# Altium PCB Copy of Platine_Spannungsmessung.PcbDoc
Units mm, origin at the board's own origin, x right, y up, seen from the top; angles counter-clockwise.
Board outline 188.5 x 153 mm, 2 copper layers (Top Layer, Bottom Layer), stack 1.27 mm thick; 74 components, 29 nets, 188 pads, 0 vias.
Unrouted connection lines stored in the file: 24.
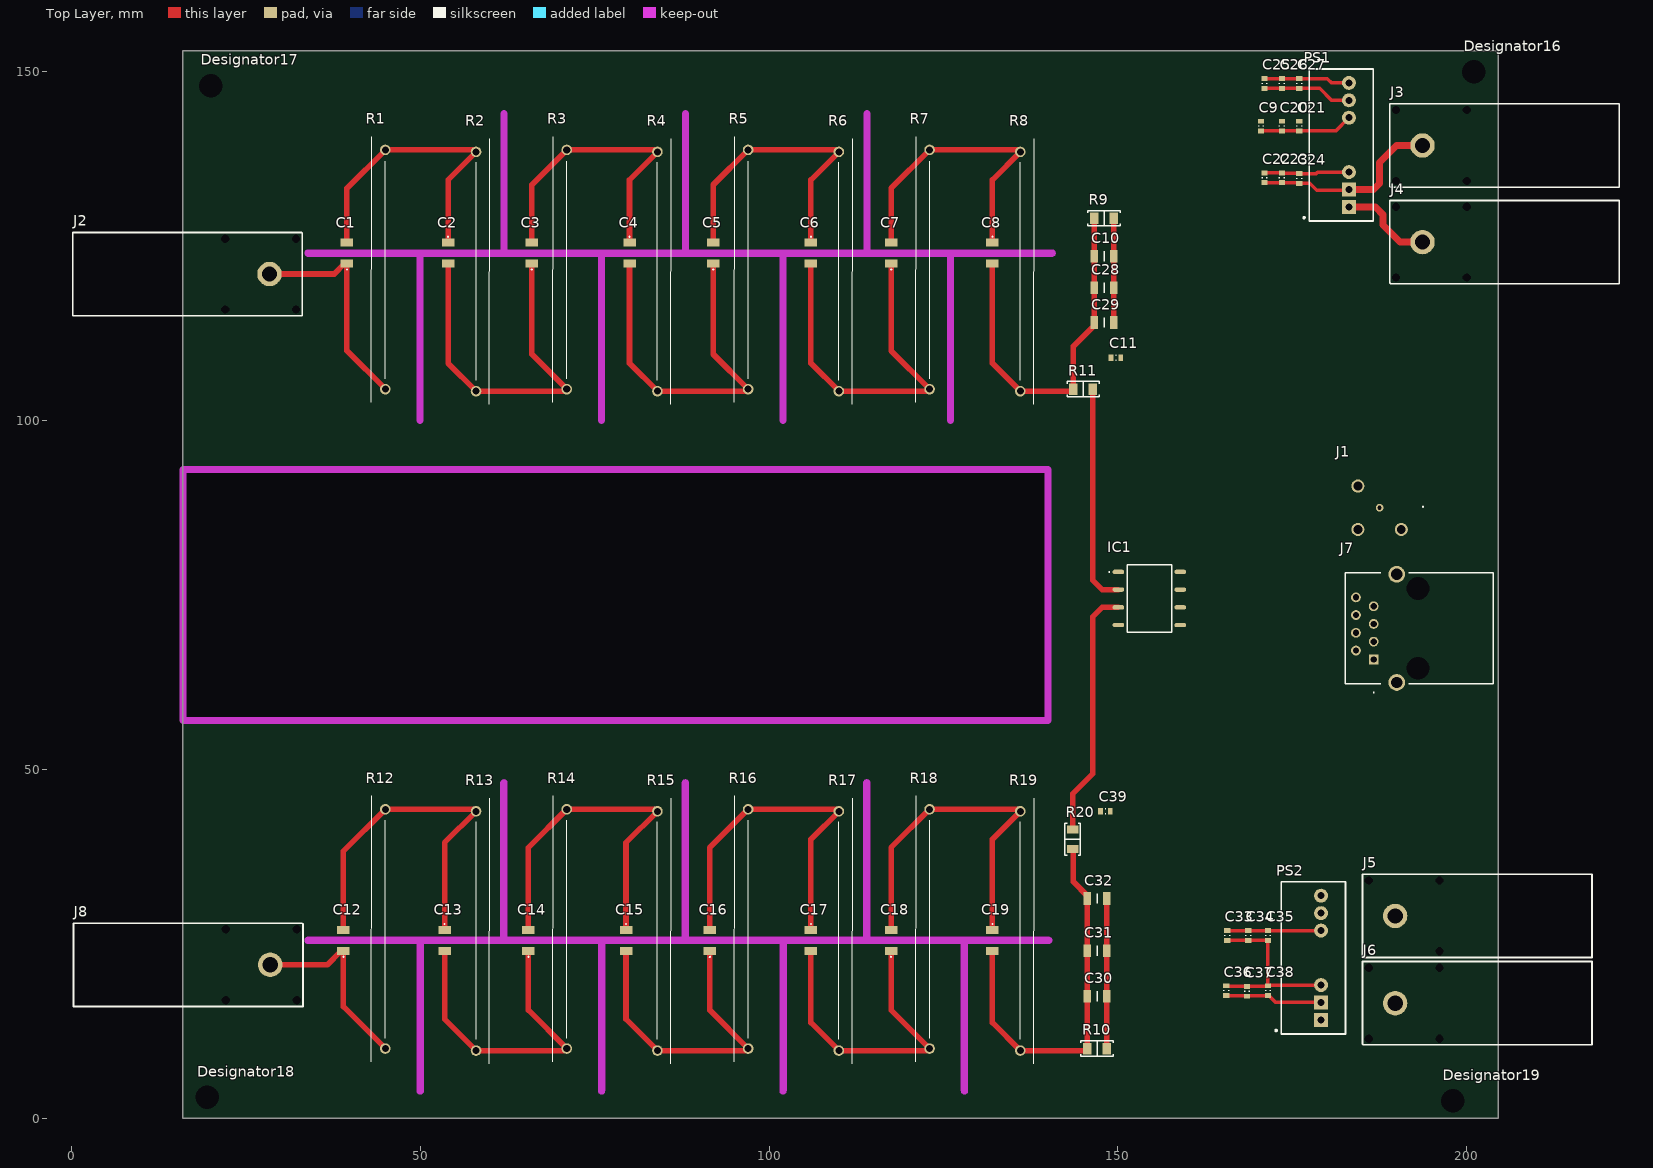
[diagram p0: Top Layer view]
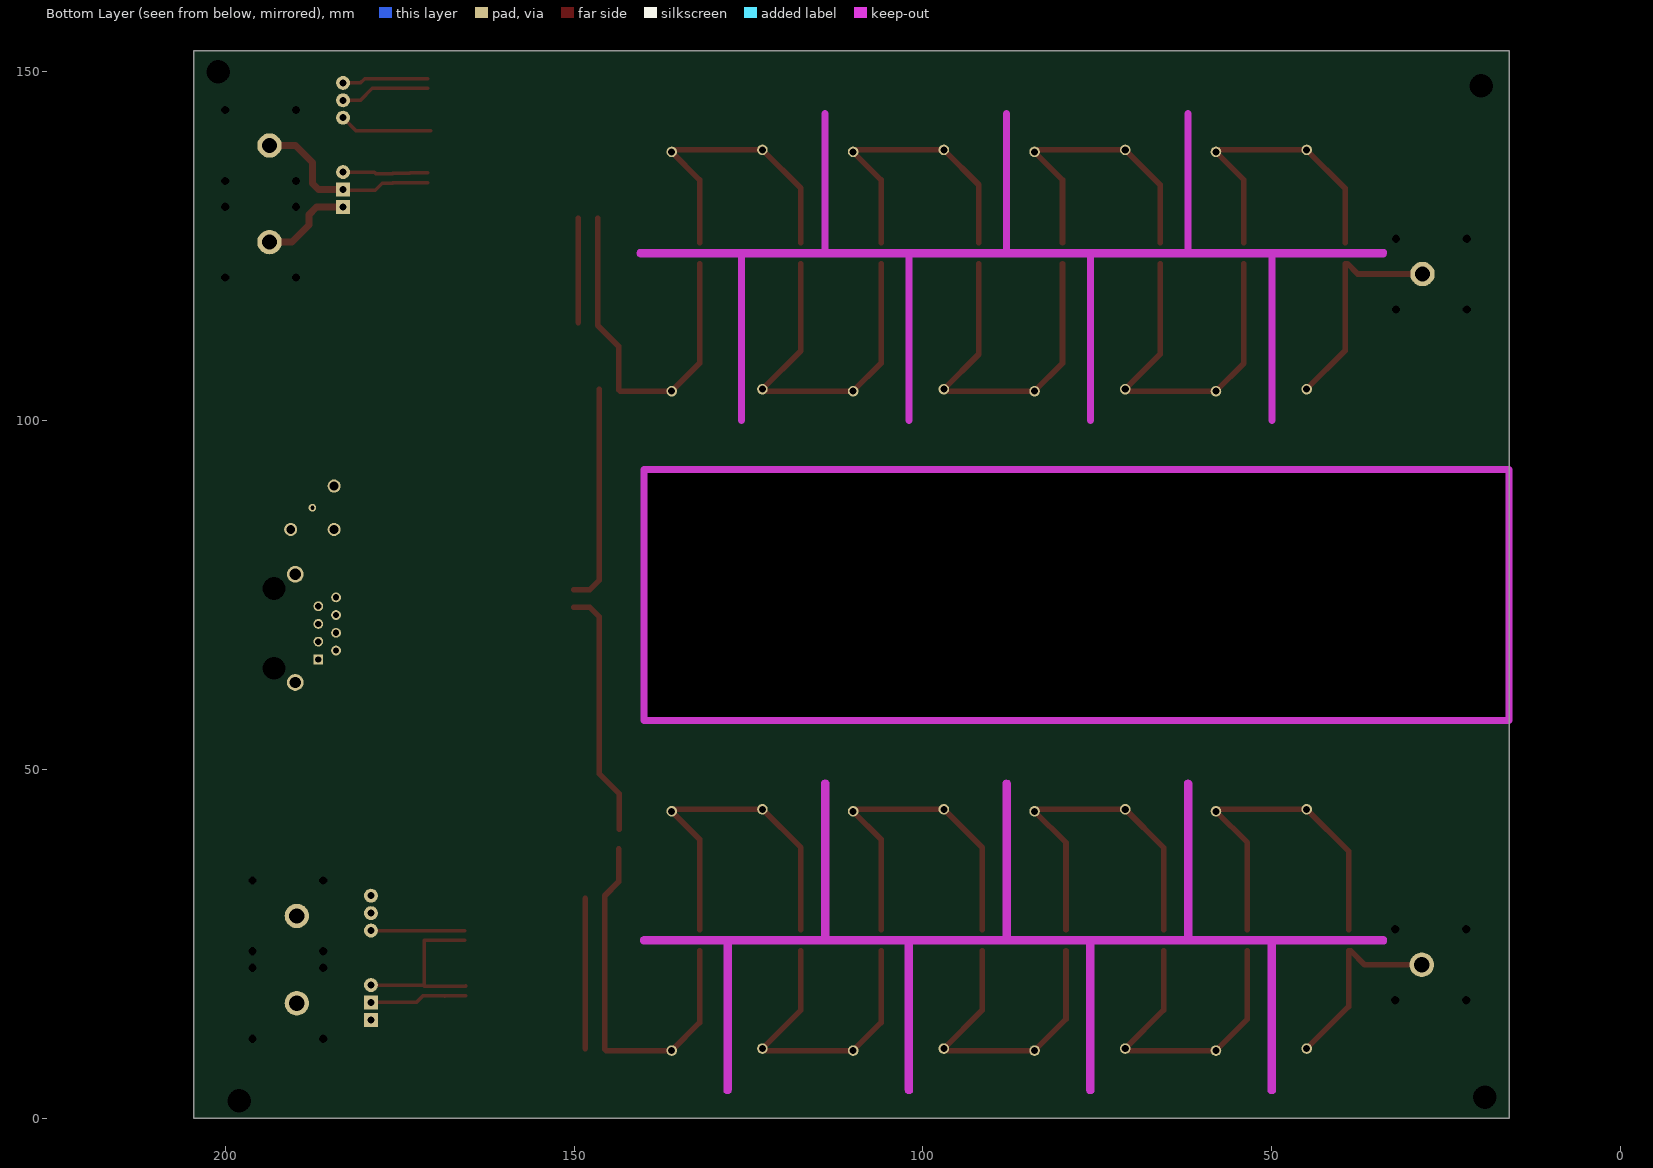
[diagram p1: Bottom Layer view, seen from below]

## Layer stack, top to bottom
Top Solder: solder mask 0.01, Solder Resist, Dk 3.5
Top Layer: signal copper 0.035
Core: core 1.2, Kern FR4, Dk 4.3
Bottom Layer: signal copper 0.035
Bottom Solder: solder mask 0.01, Solder Resist, Dk 3.5

## Board outline
204.5,0 204.5,153 16,153 16,0
cut-out: 16,57 16,93 140,93 140,57
cut-out: 127.5,4 ccw(c128,4) 128.5,4 128.5,25 ccw(c128,25) 127.5,25
cut-out: 113.5,26 ccw(c114,26) 114.5,26 114.5,48 ccw(c114,48) 113.5,48
cut-out: 101.5,4 ccw(c102,4) 102.5,4 102.5,25 ccw(c102,25) 101.5,25
cut-out: 87.5,26 ccw(c88,26) 88.5,26 88.5,48 ccw(c88,48) 87.5,48
cut-out: 75.5,4 ccw(c76,4) 76.5,4 76.5,25 ccw(c76,25) 75.5,25
cut-out: 49.5,4 ccw(c50,4) 50.5,4 50.5,25 ccw(c50,25) 49.5,25
cut-out: 61.5,26 ccw(c62,26) 62.5,26 62.5,48 ccw(c62,48) 61.5,48
cut-out: 34,25 cw(c34,25.5) 34,26 140,26 cw(c140,25.5) 140.5,25.5 cw(c140,25.5) 140,25
cut-out: 34,123.5 cw(c34,124) 34,124.5 140.5,124.5 cw(c140.5,124) 141.001,124 cw(c140.5,124) 140.5,123.5

## Design rules (kind name [scope] priority, off if disabled: settings)
Clearance [All] p1: gap=0 ignorepadtopadclearanceinfootprint=FALSE
Creepage "2_2 -> 4_2" [InNet('NetC2_2') vs InNet('NetC4_2')] p1: checkdistance=15 applytopolygonpour=TRUE
Creepage "1_2 -> 3_2" [InNet('NetC1_2') vs InNet('NetC3_2')] p2: checkdistance=15 applytopolygonpour=TRUE
Creepage "1_1 -> 2_2" [InNet('NetC1_1') vs InNet('NetC2_2')] p3: checkdistance=15 applytopolygonpour=TRUE
Creepage "19_2 -> GND_HV" [InNet('NetC19_2') vs InNet('GND_HV')] p4: checkdistance=10 applytopolygonpour=TRUE
Creepage "18_2 -> GND_HV" [InNet('NetC18_2') vs InNet('24V_HV')] p5: checkdistance=15 applytopolygonpour=TRUE
Creepage "17_2 -> GND_HV" [InNet('NetC17_2') vs InNet('GND_HV')] p6: checkdistance=20 applytopolygonpour=TRUE
Creepage "16_2 -> GND_HV" [InNet('NetC16_2') vs InNet('GND_HV')] p7: checkdistance=25 applytopolygonpour=TRUE
Creepage all_nets [InNetClass('All Nets') vs InNetClass('All Nets')] p8: checkdistance=5 applytopolygonpour=TRUE
Creepage "15_2 -> GND_HV" [InNet('NetC15_2') vs InNet('GND_HV')] p9: checkdistance=30 applytopolygonpour=TRUE
Creepage "14_2 -> GND_HV" [InNet('NetC14_2') vs InNet('GND_HV')] p10: checkdistance=35 applytopolygonpour=TRUE
Creepage "13_2 -> GND_HV" [InNet('NetC13_2') vs InNet('GND_HV')] p11: checkdistance=35 applytopolygonpour=TRUE
Creepage "12_2 -> GND_HV" [InNet('NetC12_2') vs InNet('GND_HV')] p12: checkdistance=35 applytopolygonpour=TRUE
Creepage "12_1 -> GND_HV" [InNet('NetC12_1') vs InNet('GND_HV')] p13: checkdistance=35 applytopolygonpour=TRUE
Creepage "7_2 -> GND_HV" [InNet('NetC7_2') vs InNet('24V_HV')] p14: checkdistance=1 applytopolygonpour=TRUE
Creepage "6_2 -> GND_HV" [InNet('NetC6_2') vs InNet('GND_HV')] p15: checkdistance=1.5 applytopolygonpour=TRUE
Creepage "5_2 -> GND_HV" [InNet('NetC5_2') vs InNet('GND_HV')] p16: checkdistance=4 applytopolygonpour=TRUE
Creepage "4_2 -> GND_HV" [InNet('NetC4_2') vs InNet('GND_HV')] p17: checkdistance=15 applytopolygonpour=TRUE
Creepage "3_2 -> GND_HV" [InNet('NetC3_2') vs InNet('GND_HV')] p18: checkdistance=20 applytopolygonpour=TRUE
Creepage "2_2 -> GND_HV" [InNet('NetC2_2') vs InNet('GND_HV')] p19: checkdistance=25 applytopolygonpour=TRUE
Creepage "1_2 -> GND_HV" [InNet('NetC1_2') vs InNet('GND_HV')] p20: checkdistance=30 applytopolygonpour=TRUE
Creepage "1_1 -> GND_HV" [InNet('NetC1_1') vs InNet('GND_HV')] p21: checkdistance=35 applytopolygonpour=TRUE // 1_Block
DiffPairsRouting [All] p1: maxlimit=0.254 minlimit=0.254 mostfreqgap=0.254 toplayer_minwidth=0.381 toplayer_maxwidth=0.381 toplayer_prefwidth=0.381 bottomlayer_minwidth=0.381 bottomlayer_maxwidth=0.381 bottomlayer_prefwidth=0.381 maxuncoupledlength=12.7
PolygonConnect [All] p1: connectstyle=Relief reliefconductorwidth=0.254 reliefentries=4 polygonreliefangle="90 Angle" airgapwidth=0.254
RoutingVias [All] p1: holewidth=0.711 width=1.27 viastyle="Through Hole" minholewidth=0.711 minwidth=1.27 maxholewidth=0.711 maxwidth=1.27
SolderMaskExpansion [All] p1: expansion=0.102 istentingtop=FALSE
Width [All] p1: maxlimit=1 minlimit=0.254 preferedwidth=0.8
29 further rules are at their usual default settings.

## Classes and differential pairs
differential pair U_OUT: +U_OUT_P -U_OUT_N

## Components (designator, comment, footprint, x,y, rotation, side; value= is the part's Value field where it differs from the comment)
C1 "10 pF" C1206 39.5,124 r90 top
C2 "10 pF" C1206 54,124 r270 top
C3 "10 pF" C1206 66,124 r90 top
C4 "10 pF" C1206 80,124 r270 top
C5 "10 pF" C1206 92,124 r90 top
C6 "10 pF" C1206 106,124 r270 top
C7 "10 pF" C1206 117.5,124 r90 top
C8 "10 pF" C1206 132,124 r270 top
C9 "1 µF" C_0603 170.5,142.2 r270 top
C10 "47000 pF" CAPC3216X94N 148,123.55 r0 top
C11 "3.2 pF" C_0603 149.7,109 r180 top
C12 "10 pF" C1206 39,25.5 r90 top
C13 "10 pF" C1206 53.5,25.5 r270 top
C14 "10 pF" C1206 65.5,25.5 r90 top
C15 "10 pF" C1206 79.5,25.5 r270 top
C16 "10 pF" C1206 91.5,25.5 r90 top
C17 "10 pF" C1206 106,25.5 r270 top
C18 "10 pF" C1206 117.5,25.5 r90 top
C19 "10 pF" C1206 132,25.5 r270 top
C20 "1 µF" C_0603 173.5,142.2 r270 top
C21 "1 µF" C_0603 176,142.2 r270 top
C22 "1 µF" C_0603 171,134.8 r90 top
C23 "1 µF" C_0603 173.5,134.8 r90 top
C24 "1 µF" C_0603 176,134.7 r90 top
C25 "1 µF" C_0603 171,148.3 r90 top
C26 "1 µF" C_0603 173.5,148.3 r90 top
C27 "1 µF" C_0603 176,148.3 r90 top
C28 "300 pF" CAPC3216X94N 148,119.05 r0 top
C29 "2700 pF" CAPC3216X94N 148,114.05 r0 top
C30 "47000 pF" CAPC3216X94N 147,17.5 r0 top
C31 "300 pF" CAPC3216X94N 147,24 r0 top
C32 "2700 pF" CAPC3216X94N 147,31.5 r0 top
C33 "1 µF" C_0603 165.658,26.2 r90 top
C34 "1 µF" C_0603 168.658,26.2 r90 top
C35 "1 µF" C_0603 171.5,26.2 r90 top
C36 "1 µF" C_0603 165.5,18.3 r90 top
C37 "1 µF" C_0603 168.5,18.2 r90 top
C38 "1 µF" C_0603 171.5,18.3 r90 top
C39 "3.2 pF" C_0603 148.2,44 r180 top
Designator16 "Comment" "Mounting Hole" 201,150 r0 top
Designator17 "Comment" "Mounting Hole" 20,148 r0 top
Designator18 "Comment" "Mounting Hole" 19.5,3 r0 top
Designator19 "Comment" "Mounting Hole" 198,2.5 r0 top
IC1 "SI8920BC-IP" SI8920BCIP 154.5,74.5 r0 top
J1 "BNC7T-J-P-GN-ST-TH1" BNC7TJPGNSTTH1 187.5,87.5 r0 top
J2 "Laborbuchse" CLIFF_FCR7350B 27.127,121 r0 top
J3 "Laborbuchse" CLIFF_FCR7350B 194.92,139.42 r180 top
J4 "Laborbuchse" CLIFF_FCR7350B 194.92,125.58 r180 top
J5 "Laborbuchse" CLIFF_FCR7350B 191,29 r180 top
J6 "Laborbuchse" CLIFF_FCR7350B 191,16.5 r180 top
J7 "615008142621" 615008142621_Ethernet_Port 186.65,65.77 r90 top
J8 "Laborbuchse" CLIFF_FCR7350B 27.22,22 r0 top
PS1 "EC3SAW-24D05HP" EC3SAW 182,139.5 r90 top
PS2 "EC3SAW-24S05HP" EC3SAW 178,23 r90 top
R1 "1.00M" USF370100M0015PPM 45,104.5 r90 top
R2 "1.00M" USF370100M0015PPM 58,138.5 r270 top
R3 "1.00M" USF370100M0015PPM 71,104.5 r90 top
R4 "1.00M" USF370100M0015PPM 84,138.5 r270 top
R5 "1.00M" USF370100M0015PPM 97,104.5 r90 top
R6 "1.00M" USF370100M0015PPM 110,138.5 r270 top
R7 "1.00M" USF370100M0015PPM 123,104.5 r90 top
R8 "1.00M" USF370100M0015PPM 136,138.5 r270 top
R9 "200 Ohm" "RES 1206_3216" 148,129 r180 top
R10 "200 Ohm" "RES 1206_3216" 147,10 r180 top
R11 "1k" "RES 1206_3216" 145,104.5 r0 top
R12 "1.00M" USF370100M0015PPM 45,10 r90 top
R13 "1.00M" USF370100M0015PPM 58,44 r270 top
R14 "1.00M" USF370100M0015PPM 71,10 r90 top
R15 "1.00M" USF370100M0015PPM 84,44 r270 top
R16 "1.00M" USF370100M0015PPM 97,10 r90 top
R17 "1.00M" USF370100M0015PPM 110,44 r270 top
R18 "1.00M" USF370100M0015PPM 123,10 r90 top
R19 "1.00M" USF370100M0015PPM 136,44 r270 top
R20 "1k" "RES 1206_3216" 143.5,40 r90 top

## Footprints (in the part's own frame and the unit in brackets; to place one, negate y for a bottom-side part, rotate by r counter-clockwise, add the part's x,y. Pads: shape width x height; smd on the part's side, far side on the other; paste and mask are expansions set on the pad)
615008142621_Ethernet_Port [mm] "Modulare Steckverbinder / Ethernet-Steckverbinder WR-MJ Feml Shielded 8P8C Rear Pst Tb Dwn"
  rect 1.4x1.4 hole 0.9: 1(0,0)
  round 1.4 hole 0.9: 2(1.27,2.54) 3(2.54,0) 4(3.81,2.54) 5(5.08,0) 6(6.35,2.54) 7(7.62,0) 8(8.89,2.54)
  round 2.4 hole 1.6: MH1(-3.305,-3.3) MH2(12.195,-3.3)
  round 1.625 hole 3.25 unplated: MH3(-1.27,-6.35) MH4(10.16,-6.35)
  silkscreen extent -4.8,-17.15 12.38,4.05, body extent -4.01,-17.15 12.9,4.05, height 13.9
BNC7TJPGNSTTH1 [mm] "BNC_Buchse: RF-Steckverbinder/Koaxial-Steckverbinder 75 Ohm BNC Jack"
  round 1.1 hole 0.6: 1(0,0)
  round 1.875 hole 1.25: 2(3.11,-3.11) 3(-3.11,3.11) 4(-3.11,-3.11)
  silkscreen extent 6.15,0.1 6.25,0.2, body extent -5.5,-5.5 5.5,5.5, height 13.9
C1206 [mm]
  rect 1.15x1.8 smd: 1(-1.5,0) 2(1.5,0)
  silkscreen extent -2.4,-0.05 -2.3,0.05, body extent -1.7,-0.9 1.7,0.9, height 1.1
C_0603 [mm] "Chip Capacitor, Body 1.6x0.8mm, Height 1.0mm, IPC High Density"
  rect 0.7x0.9 smd: 1(-0.7,0) 2(0.7,0)
  silkscreen extent -0.05,-0.35 0.05,0.35, body extent -0.87,-0.47 0.88,0.48, height 1
CAPC3216X94N [mm]
  rect 1.02x1.82 smd: 1(-1.4,0) 2(1.4,0)
  silkscreen extent 0,-0.7 0,0.7, body extent -1.6,-0.8 1.6,0.8, height 0.94
CLIFF_FCR7350B [mm]
  round 3.5 hole 2.2: 1(1.28,0)
  round 0 hole 1.2: 2(-5.08,-5.08) 2(-5.08,5.08) 2(5.08,-5.08) 2(5.08,5.08)
  silkscreen extent -26.92,-5.97 5.97,5.97, body extent -26.92,-5.97 5.97,5.97, height 11.5
EC3SAW [mm] "Isolierte DC/DC-Wandler – Durchsteckmontage 10W 8.5-160Vin +/-5out 1A"
  rect 2x2 hole 1: 1(-8.9,-1.1) 2(-6.4,-1.1)
  round 2 hole 1: 3(-3.9,-1.1) 6(3.9,-1.1) 7(6.4,-1.1) 8(8.9,-1.1)
  silkscreen extent -10.9,-4.6 10.9,5.46, body extent -10.92,-4.57 10.92,4.57, height 11.1
"Mounting Hole" [mm]
  round 3.1 hole 3.4: 1(0,0)
"RES 1206_3216" [mm] "Chip Resistor, 2-Leads, Body 3.13x1.55mm, IPC Medium Density"
  rect 1.2x1.65 smd: 1(-1.4,0) 2(1.4,0)
  silkscreen extent -2.3,-1.1 2.3,1.1, body extent -1.6,-0.8 1.6,0.8, height 0.6
SI8920BCIP [mm]
  rrect100% 1.675x0.625 smd: 1(-4.438,3.81) 2(-4.438,1.27) 3(-4.438,-1.27) 4(-4.438,-3.81) 5(4.438,-3.81) 6(4.438,-1.27) 7(4.438,1.27) 8(4.438,3.81)
  silkscreen extent -5.8,-4.82 3.17,4.82, body extent -3.17,-4.82 3.17,4.82, height 4.29
USF370100M0015PPM [mm]
  round 1.515 hole 1.01: 1(0,0) 2(34.29,0)
  silkscreen extent -1.91,0 36.2,2, body extent -1.91,-0.4 36.2,1.91, height 13.31

## Part data
C1 C2 C3 C4 C5 C6 C7 C8 C12 C13 C14 C15 C16 C17 C18 C19: library part C1206C100FGGACTU, "Capacitor", Manufacturer_Name=KEMET, Mouser Part Number=80-C1206C100FGG, Datasheet Link=https://content.kemet.com/datasheets/KEM_C1009_C0G_HV_SMD.pdf, Manufacturer_Part_Number=C1206C100FGGACTU, Mouser Price/Stock=https://www.mouser.com/Search/Refine.aspx?Keyword=80-C1206C100FGG, Supplier 1=Mouser, Supplier Part Number 1=80-C1206C100FGG
C9 C20 C21 C22 C23 C24 C25 C26 C27 C33 C34 C35 C36 C37 C38: library part JMK107BJ105MA-T, "Capacitor 0603, 6.3 VDC, 1 µF, X7R", Device Package=0603, Manufacturer="Tajyo Yuden", Operating Temperature="-55 - 85°C", Supplier Part Number 1=963-JMK107BJ105MA-T, Tolerance="20 %", Voltage Rating="6.3 VDC", Component Type="Capacitor 0603", ComponentLink1Description=Datasheet, ComponentLink1URL=https://www.mouser.de/datasheet/2/396/mlcc02_e-1307760.pdf, Created from=MGremer, Created On="20.12.2020 13:54:13", Last Updated="20.12.2020 16:43:29", Live Cycle Status=1, Manufacturer Part Number=JMK107BJ105MA-T, Mounting Type=SMD, PartID=48, Series=CC, Stock number="not stored", Supplier 1=Mouser, Type=Capacitor
C10: library part 12061A101FAT4A, "12061A101FAT4A", Manufacturer_Part_Number=GCM31M5C1H473FA16L, Mouser Part Number=1%#, Supplier Part Number 1=81-GCM31M5C1H473FA6L, Tolerance=1%, Datasheet Link=https://www.mouser.de/datasheet/2/281/GCM31M5C1H473FA16_01-1969554.pdf, Height=0.94mm, Supplier 1=Mouser
C11 C39: library part 06033C222KAT4A, "Kondensator aus mehreren Keramikschichten MLCC - SMD/SMT 50V 3.2pF C0G 0.10pF 0603 AEC-Q200", Device Package=0603, Manufacturer=AVX, Manufacturer Part Number=CBR06C329B5GACAUTO, Operating Temperature="-55 - 125°C", Supplier Part Number 1=80-CBR06C329B5GAUTO, Tolerance="0.1 pF", Voltage Rating="50 VDC", Component Type="Capacitor 0603", ComponentLink1Description=Datasheet, ComponentLink1URL=https://www.mouser.de/datasheet/2/212/1/KEM_C1121_CBR_AUTO-3045151.pdf, Created from=TGaupp, Created On="20.12.2020 13:54:13", Last Updated="21.05.2021 10:00:47", Live Cycle Status=1, Mounting Type=SMD, PartID=6, Series="MLCC X7R", Stock number="Labor SMD Container", Supplier 1=Mouser, Type=Capacitor
C28: library part 12061A101FAT4A, Manufacturer_Part_Number=12065A301FAT2A, Mouser Part Number=581-12065A301FAT2A, Tolerance=1%, Datasheet Link=https://www.mouser.de/datasheet/2/40/C0GNP0_Dielectric-951274.pdf, Height=0.94mm, Supplier 1=Mouser, Supplier Part Number 1=581-12065A301FAT2A
C29: library part 12061A101FAT4A, "GCM31B5C2J272FX01L", Mouser Part Number=81-GCM31B5C2J272FX1L, Tolerance=1%, Datasheet Link=https://www.mouser.de/datasheet/2/281/GCM31B5C2J272FX01_01-1969424.pdf, Height=0.94mm, Manufacturer_Part_Number=GCM31B5C2J272FX01L, Supplier 1=Mouser, Supplier Part Number 1=81-GCM31B5C2J272FX1L
C30: library part 12061A101FAT4A, "12061A101FAT4A", Manufacturer_Part_Number=GCM31M5C1H473FA16L, Mouser Part Number=81-GCM31M5C1H473FA6L, Tolerance=1%, Datasheet Link=https://www.mouser.de/datasheet/2/281/GCM31M5C1H473FA16_01-1969554.pdf, Height=0.94mm, Supplier 1=Mouser, Supplier Part Number 1=81-GCM31M5C1H473FA6L
C31: library part 12061A101FAT4A, "GCM31B5C2J272FX01L", Manufacturer_Part_Number=12065A301FAT2A, Mouser Part Number=581-12065A301FAT2A, Tolerance=1%, Datasheet Link=https://www.mouser.de/datasheet/2/40/C0GNP0_Dielectric-951274.pdf, Height=0.94mm, Supplier 1=Mouser, Supplier Part Number 1=581-12065A301FAT2A
C32: library part 12061A101FAT4A, "GCM31B5C2J272FX01L", Mouser Part Number=81-GCM31B5C2J272FX01L, Supplier Part Number 1=81-GCM31B5C2J272FX1L, Tolerance=1%, Datasheet Link=https://www.mouser.de/datasheet/2/281/GCM31B5C2J272FX01_01-1969424.pdf, Height=0.94mm, Manufacturer_Part_Number=GCM31B5C2J272FX01L, Supplier 1=Mouser
IC1: "Integrated Circuit", Manufacturer_Name="Skyworks Solutions Inc", Datasheet Link=https://www.skyworksinc.com/-/media/Skyworks/SL/documents/public/data-sheets/si8920-datasheet.pdf, Height=4.19mm, Manufacturer_Part_Number=SI8920BC-IP
J1: "Connector", Manufacturer_Name=SAMTEC, Mouser Part Number=200-BNC7TJPGNSTTH1, Arrow Part Number=BNC7T-J-P-GN-ST-TH1, Arrow Price/Stock=https://www.arrow.com/en/products/bnc7t-j-p-gn-st-th1/samtec?region=nac, Datasheet Link=http://suddendocs.samtec.com/prints/bnc7t-j-p-xx-st-th1-mkt.pdf, Height=13.8mm, Manufacturer_Part_Number=BNC7T-J-P-GN-ST-TH1, Mouser Price/Stock=https://www.mouser.co.uk/ProductDetail/Samtec/BNC7T-J-P-GN-ST-TH1?qs=PB6%2FjmICvI3qnQXVHkyRWQ%3D%3D
J2 J3 J4 J5 J6 J8: library part CLIFF_FCR7350B, "Connector"
J7: "Connector", Manufacturer_Name="Wurth Elektronik", Mouser Part Number=710-615008142621, Datasheet Link=http://katalog.we-online.com/em/datasheet/615008142621.pdf, Height=13.8mm, Manufacturer_Part_Number=615008142621, Mouser Price/Stock=https://www.mouser.co.uk/ProductDetail/Wurth-Elektronik/615008142621?qs=2kOmHSv6VfTS8PHib9xohA%3D%3D
PS1: "Isolierte DC/DC-Wandler – Durchsteckmontage 3W 9-36Vin +/-5Vout 300mA"
PS2: "Isolierte DC/DC-Wandler – Durchsteckmontage 3W 9-36Vin 5Vout 600mA"
R1 R2 R3 R4 R5 R6 R7 R8 R12 R13 R14 R15 R16 R17 R18 R19: library part USF370-1.00M-0.01%-5PPM, "Resistor", Manufacturer_Name=Caddock, Mouser Part Number=684-USF370-1M, Datasheet Link=https://www.mouser.com/datasheet/2/62/TypeUSF-3658.pdf, Height=13.21mm, Manufacturer_Part_Number=USF370-1.00M-0.01%-5PPM, Mouser Price/Stock=https://www.mouser.com/Search/Refine.aspx?Keyword=684-USF370-1M, Supplier 1=Mouser, Supplier Part Number 1=684-USF370-1M
R9: library part ERJ-8ENF1002V, "SMD resistor 0.1%", Device Package=1206, Manufacturer="TE Connectivity", Manufacturer Part Number=RQ73C2B200RBTD, Supplier Part Number 1=279-RQ73C2B200RBTD, Tolerance=0.1%, Component Type="SMD resistor", ComponentLink1Description=Datasheet, ComponentLink1URL=https://www.mouser.de/datasheet/2/418/5/ENG_DS_1773270_2_B-1533717.pdf, Created from=TGaupp, Created On="14.12.2020 16:17:14", Last Updated="24.01.2021 12:18:37", Live Cycle Status=1, Mounting Type=SMD, PartID=201, Stock number="not stored", Supplier 1=Mouser, Type=Resistor
R10: library part ERJ-8ENF1002V, "SMD resistor 1%", Device Package=1206, Manufacturer="TE Connectivity", Manufacturer Part Number=RQ73C2B200RBTD, Supplier Part Number 1=279-RQ73C2B200RBTD, Tolerance=0.1%, Component Type="SMD resistor", ComponentLink1Description=Datasheet, ComponentLink1URL=https://www.mouser.de/datasheet/2/418/5/ENG_DS_1773270_2_B-1533717.pdf, Created from=TGaupp, Created On="14.12.2020 16:17:14", Last Updated="24.01.2021 12:18:37", Live Cycle Status=1, Mounting Type=SMD, PartID=201, Stock number="not stored", Supplier 1=Mouser, Type=Resistor
R11 R20: library part ERJ-8ENF1002V, "Dünnfilmwiderstände - SMD 1/4W 1Kohms .5% 1206 25ppm Auto", Device Package=1206, Manufacturer=Vishay, Manufacturer Part Number=MCA1206MD1001DP500, Supplier Part Number 1=594-MCA1206MD1001DP5, Tolerance=0.5%, Component Type="SMD resistor", ComponentLink1Description=Datasheet, ComponentLink1URL=https://www.mouser.de/datasheet/2/315/AOA0000C304-1149620.pdf, Created from=TGaupp, Created On="14.12.2020 16:17:14", Last Updated="24.01.2021 12:18:37", Live Cycle Status=1, Mounting Type=SMD, PartID=201, Supplier 1=Mouser, Type=Resistor

## Nets (pads, with @x,y where several pads share a name; then routed paths per layer and width w, separated by ;. In a path a pad name is that pad's centre, name@x,y a point inside that pad or via, vN(x,y) a via of type N, cw(c..) or ccw(c..) an arc to the next point about the centre after c; other vN are vias at no path point)
24V: C22.1 C23.1 C24.1 J3.1 PS1.2 | length 27.5
  Top Layer w0.5: C22.1 C23.1 173.55,134.05 175.95,134.05 C24.1 177.5,134 178.478,133.022 183.022,133.022 PS1.2
  Top Layer w1: PS1.2 186.6,133.1 187.5,134 187.5,137 189.92,139.42 J3.1
24V_HV: C36.1 C37.1 C38.1 J5.1 PS2.2 | length 14.1
  Top Layer w0.5: C36.1 165.55,17.55 168.45,17.55 C37.1 168.55,17.55 171.45,17.55 C38.1 171.6,17.6 172.6,16.6 PS2.2
  Top Layer w1: J5.1@189.69,28.97 J5.1
+5V: C9.2 C20.2 C21.2 IC1.8 PS1.6 | length 13.4
  Top Layer w0.5: C9.2 C20.2 C21.2 181.2,141.5 PS1.6
+5V_HV: C33.2 C34.2 C35.2 IC1.1 PS2.6 | length 13.4
  Top Layer w0.5: C33.2 C34.2 C35.2 PS2.6
-5V: C25.2 C26.2 C27.2 PS1.8 | length 12.3
  Top Layer w0.5: C25.2 C26.2 C27.2 180,149 180.6,148.4 PS1.8
GND: C9.1 C20.1 C21.1 C22.2 C23.2 C24.2 C25.1 C26.1 C27.1 IC1.5 J4.1 J7.MH1 J7.MH2 PS1.1 PS1.3 PS1.7 | length 38.5
  Top Layer w0.5: C22.2 C23.2 173.55,135.45 175.95,135.45 C24.2 178.4,135.4 178.6,135.6 PS1.3 ; C25.1 C26.1 C27.1 178.9,147.6 180.6,145.9 PS1.7
  Top Layer w1: PS1.1 186.9,130.6 188,129.5 188,128 190.42,125.58 J4.1
GND_HV: C10.2 C11.1 C28.2 C29.2 C30.2 C31.2 C32.2 C33.1 C34.1 C35.1 C36.2 C37.2 C38.2 C39.1 IC1.4 J6.1 PS2.1 PS2.3 R9.1 R10.1 | length 63.2
  Top Layer w0.5: C36.2 165.55,18.95 168.45,18.95 C37.2 168.55,18.95 171.45,18.95 C38.2 ; C33.1 C34.1 C35.1 C38.2 ; PS2.3 179.05,19.05 171.55,19.05 C38.2
  Top Layer w0.8: R10.1 C30.2 C31.2 C32.2 ; C29.2 C28.2 C10.2 R9.1
  Top Layer w1: J6.1@189.203,16.517 J6.1@189.72,16
NetC1_1: C1.1 J2.1 R1.1 | length 32
  Top Layer w0.8: J2.1 37.675,121 39.175,122.5 C1.1 39.5,110 R1.1
NetC1_2: C1.2 C2.1 R1.2 R2.1 | length 42.7
  Top Layer w0.8: C1.2 39.5,133.29 R1.2 R2.1@57.517,138.79 ; C2.1 54,134.5 R2.1
NetC2_2: C2.2 C3.1 R2.2 R3.1 | length 52.5
  Top Layer w0.8: C2.2 54,108.21 R2.2 R3.1@70.517,104.21 ; C3.1 66,109.5 R3.1
NetC3_2: C3.2 C4.1 R3.2 R4.1 | length 42.5
  Top Layer w0.8: C3.2 66,133.79 R3.2 R4.1@83.517,138.79 ; C4.1 80,134.5 R4.1
NetC4_2: C4.2 C5.1 R4.2 R5.1 | length 52.5
  Top Layer w0.8: C4.2 80,108.21 R4.2 R5.1@96.517,104.21 ; C5.1 92,109.5 R5.1
NetC5_2: C5.2 C6.1 R5.2 R6.1 | length 42.5
  Top Layer w0.8: C5.2 92,133.79 R5.2 R6.1@109.517,138.79 ; C6.1 106,134.5 R6.1
NetC6_2: C6.2 C7.1 R6.2 R7.1 | length 52.7
  Top Layer w0.8: C6.2 106,108.21 R6.2 R7.1@122.517,104.21 ; C7.1 117.5,110 R7.1
NetC7_2: C7.2 C8.1 R7.2 R8.1 | length 42.7
  Top Layer w0.8: C7.2 117.5,133.29 R7.2 R8.1@135.517,138.79 ; C8.1 132,134.5 R8.1
NetC8_2: C8.2 C10.1 C28.1 C29.1 R8.2 R9.2 R11.1 | length 53.5
  Top Layer w0.8: C8.2 132,108.21 R8.2 143.4,104.21 143.6,104.41 R11.1 143.6,110.65 146.6,113.65 C29.1 C28.1 C10.1 R9.2
NetC11_2: C11.2 IC1.2 R11.2 | length 31.6
  Top Layer w0.8: R11.2 146.4,77.1 147.73,75.77 IC1.2
NetC12_1: C12.1 J8.1 R12.1 | length 27.8
  Top Layer w0.8: J8.1 36.675,22 38.675,24 C12.1 39,16 R12.1
NetC12_2: C12.2 C13.1 R12.2 R13.1 | length 51.2
  Top Layer w0.8: C12.2 39,38.29 R12.2 R13.1@57.517,44.29 ; C13.1 53.5,39.5 R13.1
NetC13_2: C13.2 C14.1 R13.2 R14.1 | length 44.9
  Top Layer w0.8: C13.2 53.5,14.21 R13.2 R14.1@70.517,9.71 ; C14.1 65.5,15.5 R14.1
NetC14_2: C14.2 C15.1 R14.2 R15.1 | length 50.9
  Top Layer w0.8: C14.2 65.5,38.79 R14.2 R15.1@83.517,44.29 ; C15.1 79.5,39.5 R15.1
NetC15_2: C15.2 C16.1 R15.2 R16.1 | length 44.9
  Top Layer w0.8: C15.2 79.5,14.21 R15.2 R16.1@96.517,9.71 ; C16.1 91.5,15.5 R16.1
NetC16_2: C16.2 C17.1 R16.2 R17.1 | length 50.7
  Top Layer w0.8: C16.2 91.5,38.79 R16.2 R17.1@109.517,44.29 ; C17.1 106,40 R17.1
NetC17_2: C17.2 C18.1 R17.2 R18.1 | length 44.7
  Top Layer w0.8: C17.2 106,13.71 R17.2 R18.1@122.517,9.71 ; C18.1 117.5,15.5 R18.1
NetC18_2: C18.2 C19.1 R18.2 R19.1 | length 50.7
  Top Layer w0.8: C18.2 117.5,38.79 R18.2 R19.1@135.517,44.29 ; C19.1 132,40 R19.1
NetC19_2: C19.2 C30.1 C31.1 C32.1 R10.2 R19.2 R20.1 | length 55.1
  Top Layer w0.8: C19.2 132,13.71 R19.2 145.4,9.71 145.6,9.91 R10.2 C30.1 C31.1 C32.1 145.6,31.9 143.6,33.9 R20.1@143.6,38.6
NetC39_2: C39.2 IC1.3 R20.2 | length 35.9
  Top Layer w0.8: R20.2 143.5,46.5 146.4,49.4 146.4,71.9 147.73,73.23 IC1.3
U_OUT_N: IC1.6 J1.2 J7.2
U_OUT_P: IC1.7 J1.1 J7.1
pads on no net: Designator16.1 Designator17.1 Designator18.1 Designator19.1 J1.3 J1.4 J2.2 J3.2 J4.2 J5.2 J6.2 J7.3 J7.4 J7.5 J7.6 J7.7 J7.8 J7.MH3 J7.MH4 J8.2 PS2.7 PS2.8

## Keep-outs
Keep-Out Layer:
  lines w1: 34,25.5 140,25.5 ; 34,124 140.5,124 ; 50,4 50,25 ; 50,100 50,124 ; 62,26 62,48 ; 62,124 62,144 ; 76,4 76,25 ; 76,100 76,124 ; 88,26 88,48 ; 88,124 88,144 ; 102,4 102,25 ; 102,100 102,124 ; 114,26 114,48 ; 114,124 114,144 ; 126,100 126,124 ; 128,4 128,25 ; 16,57 16,93 140,93 140,57 16,57